# EAGLE board box (EAGLE 8.3.1)
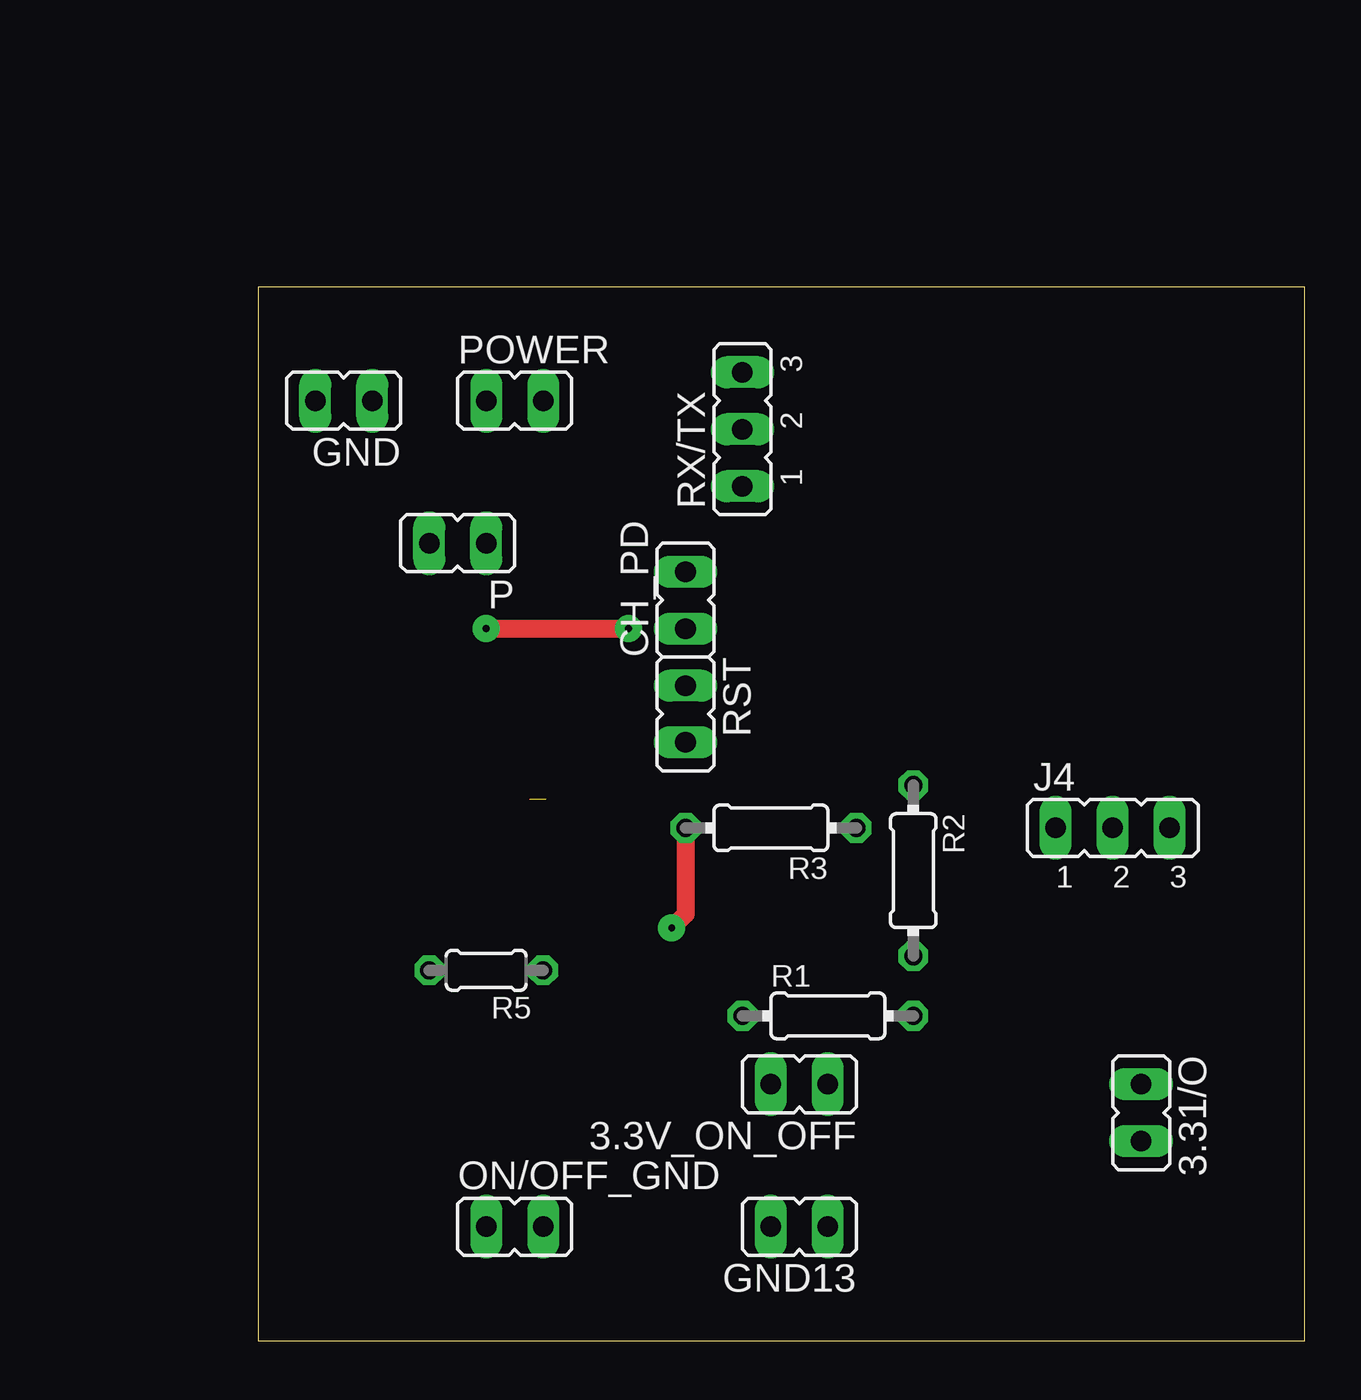
[diagram p0: board, top side]
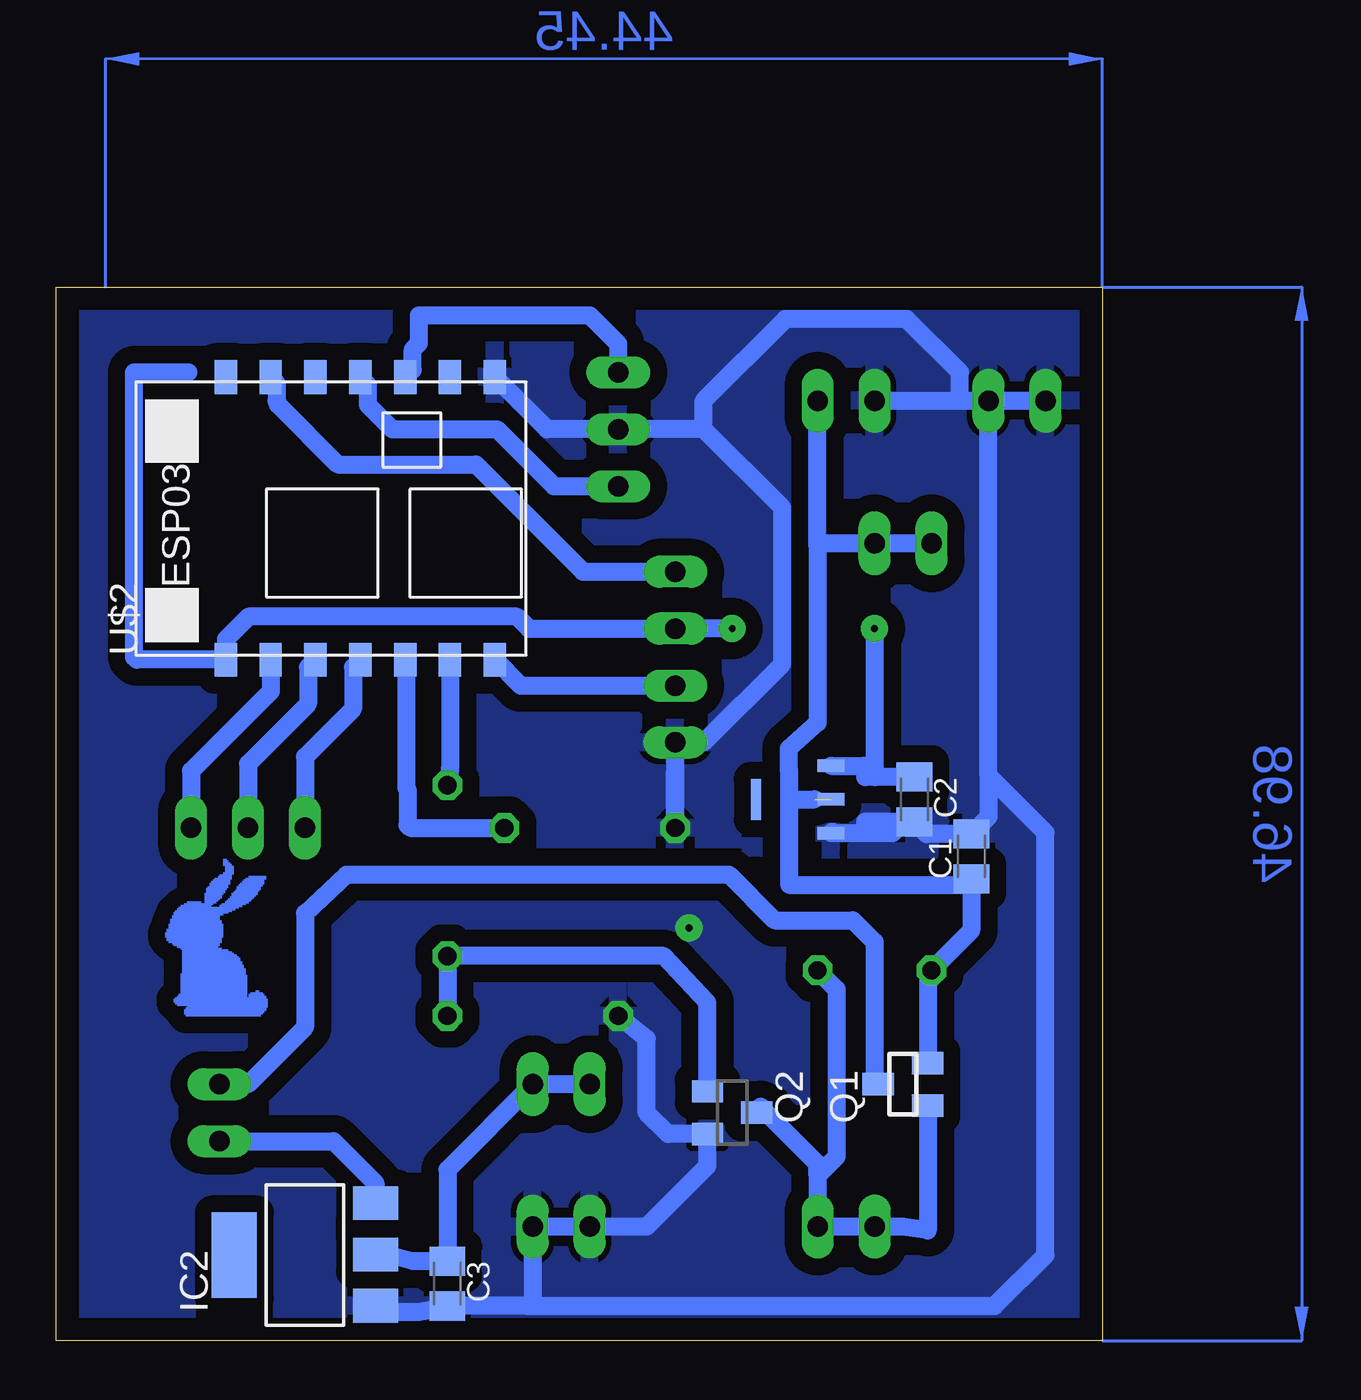
[diagram p1: board, bottom side, seen from below]

Size 46.66 x 46.98 mm. Coordinates in mm from the lower left corner, seen from the top.
Outline: 0,0 46.66,0 46.66,46.98 0,46.98 0,0
Copper layers (1*16): Top 0.035mm / dielectric 1.5mm / Bottom 0.035mm
Design rules "default *": minimum track width 6mil, minimum drill 0.35mm, track to track 30mil, track to pad 30mil, pad to pad 30mil, via to via 30mil, smd to smd 30mil, copper to edge 40mil, drill to drill 6mil, minimum pad ring 10mil, minimum via ring 8mil, stop-mask expansion 4mil, vias tented up to drill 0mil, thermal gap 10mil
Net classes: 0 default: clearance 0.205 mm

## Footprints (pad centres in the part's own frame; a part is rotated, then mirrored left to right if it is on the bottom)
JP1 = drill 0.914 long: 1 0,-1.27; 2 0,1.27
C0805K = smd 1.3 x 1.6: 1 -1,0; 2 1,0
SOT223 = smd 1.499 x 2.007: 1 -2.261,-3.15; 2 0.025,-3.15; 3 2.311,-3.15 | smd 3.81 x 2.007: 4 0,3.15
JP2 = drill 0.914 long: 1 -2.54,0; 2 0,0; 3 2.54,0
SUPER-SOT3 = smd 1 x 1.4: 1 -0.95,-1.1; 2 0.95,-1.1; 3 0,1.1
SOT23 = smd 1 x 1.4: 1 -0.95,-1.1; 2 0.95,-1.1; 3 0,1.1
0204/7 = drill 0.813 octagon: 1 -3.81,0; 2 3.81,0
0204/5 = drill 0.813 octagon: 1 -2.54,0; 2 2.54,0
ESP03 = smd 1.5 x 1: ANT 7.4,4.8; CH_PD 7.4,2.8; GND 7.4,-7.2; GPIO0 -5.2,-7.2; GPIO2 -5.2,-5.2; GPIO12 -5.2,0.8; GPIO13 -5.2,-1.2; GPIO14 -5.2,2.8; GPIO15 -5.2,-3.2; GPIO18 7.4,0.8; NC 7.4,-5.2; URXD 7.4,-1.2; UTXD 7.4,-3.2; VCC -5.2,4.8
SOT89 = smd 0.559 x 1.194: GND -1.499,-0.597; VIN 0,-0.597; VOUT 1.499,-0.597 | smd 1.829 x 0.457: P$4 0,2.743

## Placement (x,y rotation side)
3.3V_ON_OFF  [JP1]  24.13,11.43 90 top
3.31/O  [JP1]  39.37,10.16 180 top
C1  0.1  [C0805K]  5.84,21.59 90 bottom
C2  0.1  [C0805K]  8.38,24.13 270 bottom
C3  22uF  [C0805K]  29.21,2.54 270 bottom
CH_PD  [JP1]  19.05,33.02 0 top
GND  GND  [JP1]  3.81,41.91 90 top
GND13  GND  [JP1]  24.13,5.08 90 top
IC2  REG1117  [SOT223]  35.56,3.81 90 bottom
J4  [JP2]  38.1,22.86 0 top
ON/OFF_GND  [JP1]  11.43,5.08 270 top
P  12V  [JP1]  8.89,35.56 90 top
POWER  12V  [JP1]  11.43,41.91 270 top
Q1  FDN360P  [SUPER-SOT3]  8.89,11.43 90 bottom
Q2  BSS123  [SOT23]  16.51,10.16 270 bottom
R1  10k  [0204/7]  25.4,14.48 0 top
R2  10k  [0204/7]  29.21,20.95 270 top
R3  10k  [0204/7]  22.86,22.86 180 top
R5  6.4k  [0204/5]  10.16,16.51 180 top
RST  [JP1]  19.05,27.94 180 top
RX/TX  [JP2]  21.59,40.64 90 top
U$2  ESP03  [ESP03]  34.29,35.56 90 bottom
U$3  HT7333  [SOT89]  12.7,24.13 90 bottom

## Library data of the parts
3.3V_ON_OFF 3.31/O CH_PD GND GND13 J4 ON/OFF_GND P POWER RST RX/TX = jumper
C1-C3 R1-R3 R5 = rcl
IC2 = burr-brown; MPN: REG1117; OC_FARNELL: 1097566; OC_NEWARK: 14P6981
Q1 = transistor-power
Q2 = transistor-small-signal
U$2 = esp8266modules; DIMENSIONS: 17.3 x 12.1 mm; PINS: 14; PITCH: 0.078" / 2 mm
U$3 = HT7333_SOT89

## Nets
3.3I/OOUT: 3.3V_ON_OFF.1 3.3V_ON_OFF.2 C3.1 IC2.2
+3.3V: C2.1 CH_PD.1 U$2.VCC U$3.VOUT
+12V: C1.1 P.1 P.2 POWER.2 Q1.2 R5.2 U$3.VIN
ARD_TR: R2.1 U$2.GPIO2
CH_PD: CH_PD.2 U$2.CH_PD
GND: C1.2 C2.2 C3.2 GND13.1 GND13.2 GND.1 GND.2 IC2.1 POWER.1 Q2.2 R1.1 R3.2 RST.2 RX/TX.2 U$2.GND U$3.GND
N$2: Q2.1 R1.2 R2.2
N$3: 3.31/O.1 Q1.3
N$4: R3.1 U$2.GPIO15
N$7: J4.1 U$2.GPIO13
N$8: J4.2 U$2.GPIO12
N$9: J4.3 U$2.GPIO14
N$15: 3.31/O.2 IC2.3
N$16: RST.1 U$2.GPIO0
N$19: U$2.NC
ON/OFF_GND: ON/OFF_GND.1 ON/OFF_GND.2 Q1.1 Q2.3 R5.1
RX: RX/TX.1 U$2.URXD
TX: RX/TX.3 U$2.UTXD

## Tracks (layer width: path | path; a pad name or v marks a point on that pad's centre or on a via)
3.3I/OOUT
  Bottom 0.813: 3.3V_ON_OFF.2 3.3V_ON_OFF.1 29.21,7.62 C3.1 30.75,3.54 31.75,3.81 32.39,3.81 IC2.2
+3.3V  (via drill 0.3 pad 1.2)
  Top 0.813: v10.16,31.75 v16.51,31.75
  Bottom 0.813: v16.51,31.75 CH_PD.1 25.58,31.75 26.11,32.28 38.07,32.28 39.09,31.26 U$2.VCC 43.06,30.36 43.18,30.48 43.18,43.18 40.76,43.18 | C2.1 10.14,25.13 | 10.14,25.13 10.57,25.13 | U$3.VOUT 10.64,25.63 10.14,25.13 | 10.14,25.13 10.14,31.73 v10.16,31.75
+12V  (1 unrouted)
  Bottom 0.813: 12.7,35.38 POWER.2 | 12.7,35.38 12.7,27.56 13.99,26.39 13.99,25.5 13.97,25.4 13.97,24.13 | 13.97,24.13 12.83,24.13 | 13.97,24.13 13.97,20.32 6.11,20.32 C1.1 5.84,18.29 R5.2 7.79,16.34 Q1.2 | 12.7,35.38 12.52,35.56 P.1 P.2
ARD_TR
  Bottom 0.813: U$2.GPIO2 29.09,25.52 R2.1
CH_PD
  Bottom 0.813: U$2.CH_PD 36.83,42.7 36.83,41.91 36.76,41.84 36.76,41.73 34.1,39.06 27.94,39.06 23.16,34.29 CH_PD.2
GND  (via drill 0.3 pad 1.2)
  Top 0.813: v18.44,18.39 19.05,19.01 R3.2
  Bottom 0.813: 28.94,1.54 C3.2 | 28.94,1.54 30.48,1.27 31.42,1.27 | 31.75,1.27 31.42,1.27 | 31.42,1.27 IC2.1 | U$2.GND 24.77,40.64 RX/TX.2 17.78,40.64 | 8.85,23.13 C2.2 7.84,22.59 C1.2 5.08,23.35 5.08,25.19 | 8.85,23.13 10.57,23.13 | 12.05,22.68 U$3.GND 9.34,22.63 8.85,23.13 | 5.08,25.19 GND.1 | GND.1 GND.2 | POWER.1 6.35,41.91 | 6.35,41.91 GND.1 | 25.63,1.54 4.81,1.54 2.54,3.81 2.54,22.65 5.08,25.19 | 25.63,1.54 28.94,1.54 | R1.1 20.32,13.46 20.32,10.16 19.37,9.21 Q2.2 17.61,7.79 20.32,5.08 GND13.2 GND13.1 25.4,1.77 25.63,1.54 | 19.05,25.4 R3.2 RST.2 17.78,26.67 14.27,30.18 14.27,37.13 17.78,40.64 | 17.78,40.64 17.78,41.91 14.13,45.56 8.73,45.56 6.35,43.18 6.35,41.91
  pour Bottom: 0,46.99 46.99,46.99 46.99,0 0,0
N$2
  Bottom 0.813: R1.2 R2.2 19.56,17.14 17.61,15.07 Q2.1
N$3
  Bottom 0.813: 3.31/O.1 38.1,11.43 35.56,13.97 35.56,19.05 33.71,20.78 16.65,20.78 14.62,18.75 11.12,18.75 10.16,17.78 10.16,11.6 Q1.3
N$4
  Bottom 0.813: U$2.GPIO15 31.04,30.31 31.04,24.64 30.99,24.59 30.99,22.99 30.86,22.86 R3.1
N$7
  Bottom 0.813: U$2.GPIO13 33.42,30.03 33.42,28.16 35.56,26.03 J4.1
N$8
  Bottom 0.813: U$2.GPIO12 35.42,30.03 35.42,28.39 38.1,25.71 J4.2
N$9
  Bottom 0.813: U$2.GPIO14 37.09,28.95 40.64,25.4 J4.3
N$15
  Bottom 0.813: 3.31/O.2 34.29,8.89 32.41,7.01 IC2.3
N$16
  Bottom 0.813: U$2.GPIO0 25.94,29.21 RST.1
ON/OFF_GND
  Bottom 0.813: Q1.1 7.79,4.91 8.89,5.08 ON/OFF_GND.1 ON/OFF_GND.2 12.7,7.35 | Q2.3 15.24,10.33 15.24,10.42 12.7,7.88 12.7,7.35 | R5.1 11.86,15.67 11.86,8.2 12.7,7.35
RX
  Bottom 0.813: U$2.URXD 32.76,42.63 32.76,41.73 31.67,40.64 27,40.64 24.46,38.1 RX/TX.1
TX
  Bottom 0.813: U$2.UTXD 30.76,43.29 30.76,44.19 30.48,44.47 30.48,45.72 22.86,45.72 21.59,44.45 RX/TX.3
(copper drawn outside any net)
  shapes: Bottom area x117

## Text on the board
Bottom: -